# EAGLE board no holes - lpc1114-valdez-mut-v.04 (EAGLE 7.2.0)
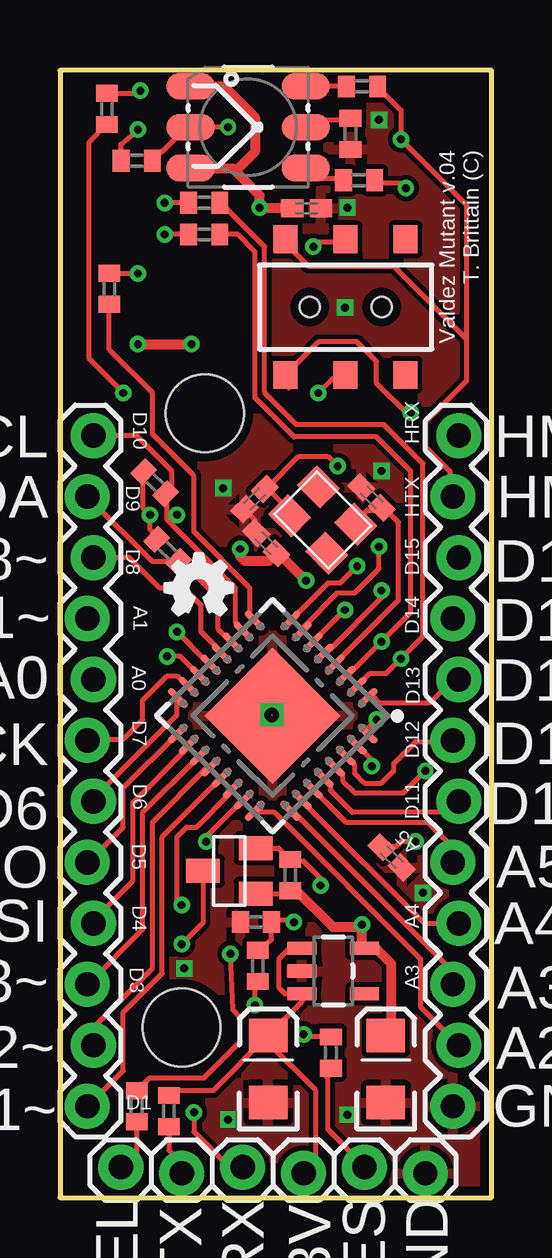
[diagram p0: board, top side]
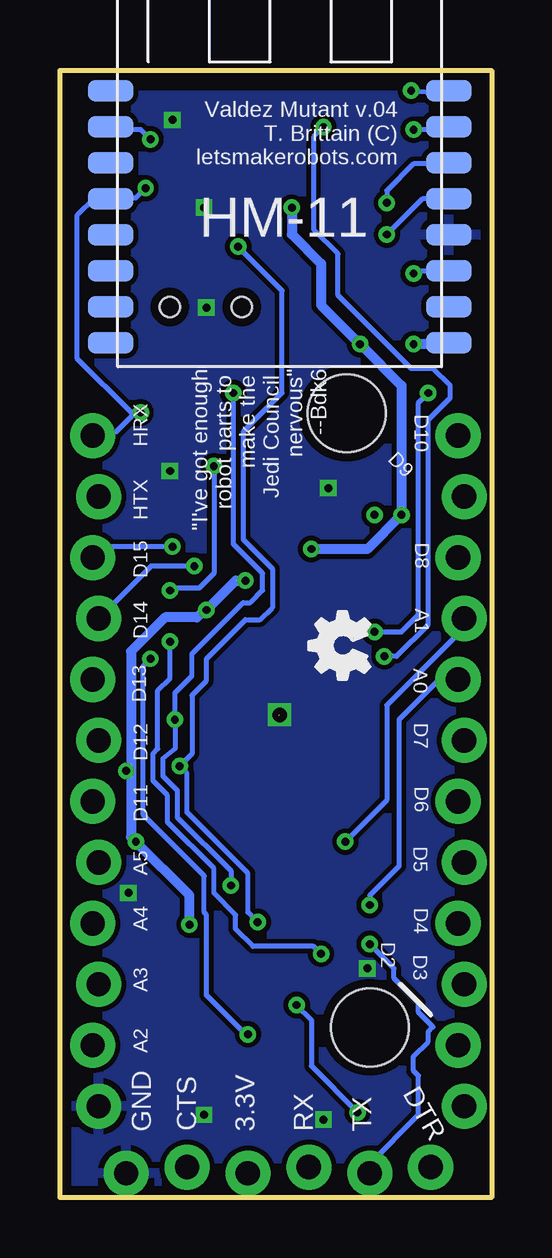
[diagram p1: board, bottom side, seen from below]

Size 18 x 46.97 mm. Coordinates in mm from the lower left corner, seen from the top.
Outline: 0,0 18,0 18,46.97 0,46.97 0,0
Copper layers (1*16): Top 0.0356mm / dielectric 1.5011mm / Bottom 0.0356mm
Design rules "LaenPCBOrder *": minimum track width 6mil, minimum drill 13mil, track to track 6mil, track to pad 6mil, pad to pad 6mil, via to via 6mil, smd to smd 6mil, copper to edge 15mil, drill to drill 6mil, minimum pad ring 7mil, minimum via ring 7mil, stop-mask expansion 3mil, vias tented up to drill 14mil, thermal gap 10mil
Net classes: 0 default: width 0.203 mm, drill 0.203 mm, clearance 0.203 mm; 1 VCC: width 0.406 mm, drill 0.406 mm, clearance 0.406 mm; 2 GND: width 0.406 mm, drill 0.406 mm, clearance 0.406 mm; 3 3.3V: width 0.406 mm, drill 0.406 mm, clearance 0.406 mm
Holes 3.25 mm at 5.07,7.1 6.04,32.68

## Footprints (pad centres in the part's own frame; a part is rotated, then mirrored left to right if it is on the bottom)
CRYSTAL_SMD_3.2X2.5 = smd 1.4 x 1.2: 1 0.6,0.5; 2 2.8,0.5; 3 2.8,2.2; 4 0.6,2.2
SOT23-5 = smd 0.55 x 1.2: 1 -0.95,-1.3; 2 0,-1.3; 3 0.95,-1.3; 4 0.95,1.3; 5 -0.95,1.3
EIA3216 = smd 1.4 x 1.6: A 1.4,0; C -1.4,0
C0402K = smd 0.925 x 0.74: 1 -0.6,0; 2 0.6,0
1X12_LOCK = drill 1.016 pad 1.88: 1 0,0.127; 2 2.54,-0.127; 3 5.08,0.127; 4 7.62,-0.127; 5 10.16,0.127; 6 12.7,-0.127; 7 15.24,0.127; 8 17.78,-0.127; 9 20.32,0.127; 10 22.86,-0.127; 11 25.4,0.127; 12 27.94,-0.127
1X06_LOCK = drill 1.016 pad 1.88: 1 0,0; 2 2.54,-0.254; 3 5.08,0; 4 7.62,-0.254; 5 10.16,0; 6 12.7,-0.254
AYZ0202 = smd 1 x 1.15: 1 -2.5,2.825; 2 0,2.825; 3 2.5,2.825; 4 -2.5,-2.825; 5 0,-2.825; 6 2.5,-2.825 | hole 0.85: 1.5,0; -1.5,0
LED-TRICOLOR-5050 = smd 2 x 1.1: 1 -2.4,1.7; 2 -2.4,0; 3 -2.4,-1.7; 4 2.4,-1.7; 5 2.4,0; 6 2.4,1.7
SOT23 = smd 1 x 1.4: 1 -0.95,-1.1; 2 0.95,-1.1; 3 0,1.1
R0402 = smd 0.7 x 0.9: 1 -0.65,0; 2 0.65,0
HVQFN33-7X7 = smd 1.067 x 0.3: P$1 -3.327,2.275; P$2 -3.327,1.625; P$3 -3.327,0.975; P$4 -3.327,0.325; P$5 -3.327,-0.325; P$6 -3.327,-0.975; P$7 -3.327,-1.625; P$8 -3.327,-2.275; P$17 3.327,-2.275; P$18 3.327,-1.625; P$19 3.327,-0.975; P$20 3.327,-0.325; P$21 3.327,0.325; P$22 3.327,0.975; P$23 3.327,1.625; P$24 3.327,2.275 | smd 0.3 x 1.067: P$9 -2.275,-3.327; P$10 -1.625,-3.327; P$11 -0.975,-3.327; P$12 -0.325,-3.327; P$13 0.325,-3.327; P$14 0.975,-3.327; P$15 1.625,-3.327; P$16 2.275,-3.327; P$25 2.275,3.327; P$26 1.625,3.327; P$27 0.975,3.327; P$28 0.325,3.327; P$29 -0.325,3.327; P$30 -0.975,3.327; P$31 -1.625,3.327; P$32 -2.275,3.327 | smd 4 x 4: P$33 0,0
HM-11 = smd 1.9 x 0.9: 1 -0.3,11.5; 2 -0.3,10; 3 -0.3,8.5; 4 -0.3,7; 5 -0.3,5.5; 6 -0.3,4; 7 -0.3,2.5; 8 -0.3,1; 9 13.8,1; 10 13.8,2.5; 11 13.8,4; 12 13.8,5.5; 13 13.8,7; 14 13.8,8.5; 15 13.8,10; 16 13.8,11.5

## Placement (x,y rotation side)
12.5MHZ  CRYSTAL_SMD_3.2X2.5  [CRYSTAL_SMD_3.2X2.5]  8.8,28.48 315 top
AP2112K-3.3TRG1  V_REG_LDOSMD  [SOT23-5]  11.4,9.44 270 top
C1  10uF  [EIA3216]  8.69,5.36 90 top
C2  22pF  [C0402K]  8.12,29.1 45 top
C3  22pF  [C0402K]  13,29.17 315 top
C4  10uF  [EIA3216]  13.59,5.36 90 top
C5  1uF  [C0402K]  13.84,14.18 315 top
C6  1uF  [C0402K]  8.61,27.27 135 top
C7  1uF  [C0402K]  10.29,41.22 0 top
JP1  M12LOCK  [1X12_LOCK]  1.27,3.81 90 top
JP2  M12LOCK  [1X12_LOCK]  16.51,3.81 90 top
JP3  [1X06_LOCK]  2.54,1.27 0 top
JS202011SCQN  DPDT  [AYZ0202]  11.91,37.11 0 top
LED1  LED-TRICOLOR-5050NO_IC  [LED-TRICOLOR-5050]  7.85,44.6 0 top
Q2  BSS138  [SOT23]  7.06,13.61 90 top
R1  330  [R0402]  11.3,6.05 90 top
R2  1k  [R0402]  2.06,37.87 270 top
R3  10k  [R0402]  4.55,3.61 90 top
R4  10k  [R0402]  9.6,13.44 270 top
R5  20k  [R0402]  8.18,11.48 180 top
R6  10k  [R0402]  8.26,9.65 90 top
R7  470  [R0402]  12.12,44.32 90 top
R8  470  [R0402]  12.6,46.3 180 top
R9  470  [R0402]  12.47,42.39 180 top
R10  4.7K  [R0402]  3.95,29.79 315 top
R11  4.7K  [R0402]  4.49,26.97 315 top
R12  330  [R0402]  6.02,41.45 180 top
R13  330  [R0402]  6.02,40.13 180 top
R14  330  [R0402]  3.2,43.21 180 top
R15  330  [R0402]  1.96,45.36 90 top
R16  330  [R0402]  3.2,3.81 90 top
U1  [HVQFN33-7X7]  8.87,20.08 225 top
U$1  HM-11  [HM-11]  15.59,34.62 0 bottom
U$2  [OSHW_FILLX100_NOTEXT]  4.38,24.28 0 top
U$3  [OSHW_FILLX100_NOTEXT]  5.08,21.59 90 bottom

## Library data of the parts
12.5MHZ = LPC1114
AP2112K-3.3TRG1 = SparkFun-PowerIC
C1 C4 = SparkFun-Capacitors
C2 C3 C5-C7 R1-R16 = resistor
JP1-JP3 = SparkFun-Connectors
JS202011SCQN = SparkFun-Electromechanical; PROD_ID: SWCH-08179
LED1 = SparkFun-LED
Q2 = SparkFun-DiscreteSemi; PROD_ID: TRANS-00830
U1 = microbuilder; DIGIKEY#: 568-4948-ND; MANF: NXP; MANF#: LPC1114FHN33/301,5
U$1 = HM-11
U$2 U$3 = ohw-logo

## Nets
3.3V: AP2112K-3.3TRG1.5 C4.A C5.1 C6.1 C7.1 LED1.1 LED1.3 Q2.1 R4.2 R10.1 R11.1 U1.P$6 U1.P$29 U$1.9
5V: AP2112K-3.3TRG1.1 AP2112K-3.3TRG1.3 C1.A JP3.4 R3.2
BUTTON?: R15.2 U$1.16
CONN: R14.2 U$1.15
GND: AP2112K-3.3TRG1.2 C1.C C2.1 C3.1 C4.C C5.2 C6.2 C7.2 JP2.1 JP3.6 R5.2 R7.1 U1.P$33 U$1.12
HM-RX: JP2.12 JS202011SCQN.4 R9.1 U$1.4
HM-TX: JP2.11 JS202011SCQN.1 R8.1 U$1.2
HM_BUTTON?: R15.1 U1.P$13
HM_CONN: LED1.2 R14.1 U1.P$14
IO20: JP2.8 U1.P$1
IO_00_RES: R1.2 R12.1 U1.P$2
IO_02: JP2.9 U1.P$8
IO_03: R2.2 U1.P$9
IO_05-SDA: JP1.11 R11.2 U1.P$11
IO_06: JP1.7 U1.P$15
IO_07: JP1.6 U1.P$16
IO_08: JP1.5 U1.P$17
IO_08-SCL: JP1.12 R10.2 U1.P$10
IO_09: JP1.4 U1.P$18
IO_10: JP1.8 U1.P$22
IO_010: JP1.3 U1.P$19
IO_11: JP1.9 U1.P$23
IO_011: JP1.1 U1.P$21
IO_12: JP2.2 U1.P$24
IO_13: JP2.3 U1.P$25
IO_14: JP2.4 U1.P$26
IO_15: JP2.7 U1.P$30
IO_18: JP2.10 U1.P$7
IO_19: JP1.10 U1.P$12
IO_32: JP2.6 U1.P$28
IO_110: JP1.2 U1.P$20
IO_111: JP2.5 U1.P$27
LPC_RES: R12.2 U$1.14
LPC_SEL: R13.1 R16.2 U1.P$3
LPC_SEL_BOOT: R13.2 U$1.13
N$2: LED1.4 R9.2
N$3: LED1.6 R8.2
N$4: LED1.5 R7.2
N$9: R2.1 U$1.11
N$31: 12.5MHZ.3 C3.2 U1.P$4
N$32: 12.5MHZ.1 C2.2 U1.P$5
RESET: JP3.5 R1.1
RX: JS202011SCQN.2 R5.1 R6.2 U1.P$31
RX-5V: JP3.3 R6.1
SEL: JP3.1 R16.1
TX: JS202011SCQN.5 Q2.2 R4.1 U1.P$32
TX-5V: JP3.2 Q2.3 R3.1

## Tracks (layer width: path | path; a pad name or v marks a point on that pad's centre or on a via)
3.3V  (via drill 0.33)
  Top 0.203: 12.8,10.36 AP2112K-3.3TRG1.5 | 13.61,6.91 C4.A | v14.83,14.83 14.22,14.83 14.02,14.63 13.61,14.63 C5.1 | U1.P$29 11.58,17.88 11.79,17.68 11.79,17.37 12.29,16.87 14.33,16.87 v15.24,17.78 | 10.36,22.96 U1.P$6 10.53,23.13 v11.89,24.49 | 5.49,42.88 LED1.3 | 3.45,30.28 R10.1 3.45,30.07 3.45,28.75 v3.76,28.45 3.76,27.84 4.03,27.57 R11.1 | 9.87,12.79 R4.2 9.48,12.66 Q2.1
  Top 0.406: 9.87,12.79 11.38,11.28 12.5,11.28 v12.6,11.38 12.6,10.49 AP2112K-3.3TRG1.5 13.18,10.39 13.82,9.75 13.82,7.11 13.61,6.91 | C7.1 9.66,41.25 v8.33,41.25 8.33,41.76 7.32,42.77 | 7.32,42.77 7.21,42.88 5.48,42.88 LED1.3 | LED1.1 6.83,46.3 8.13,45.01 8.13,43.59 7.32,42.77 | v7.52,27.03 7.52,26.72 7.72,26.52 8.7,26.52 C6.1 9.12,26.85 v10.26,25.7 | v3.25,35.56 v5.49,35.56
  Bottom 0.203: 3.86,28.35 v3.76,28.45
  Bottom 0.406: v8.33,41.25 8.33,40.13 7.11,38.91 7.11,37.19 v5.49,35.56 | v5.49,35.56 5.44,35.51 | 5.44,35.51 3.76,33.83 v3.76,28.45 5.18,27.03 v7.52,27.03 | U$1.9 1.85,35.56 v3.25,35.56 | v5.49,35.56 5.44,35.56 5.44,35.51 | v12.6,11.38 12.6,12.6 v14.83,14.83 15.04,15.04 15.04,17.98 | 15.04,17.98 15.04,22.76 13.61,24.18 12.29,24.18 v11.89,24.49 10.67,25.7 v10.26,25.7 | 15.04,17.98 v15.24,17.78
5V
  Top 0.203: AP2112K-3.3TRG1.1 9.96,10.36 9.55,10.36 9.14,9.96 9.14,8.74 9.39,8.49 AP2112K-3.3TRG1.3 10.1,8.17 C1.A | 8.74,6.71 C1.A | JP3.4 10.67,1.52 10.67,4.47 8.69,6.45 C1.A | 8.38,6.76 C1.A | C1.A 6.39,4.46 4.75,4.46 R3.2
BUTTON?  (via drill 0.33)
  Top 0.203: R15.2 3.14,46.01 v3.35,46.13
  Bottom 0.203: 2.03,46.33 1.83,46.13 U$1.16 1.88,46.02 v3.35,46.13
CONN  (via drill 0.33)
  Top 0.203: R14.2 2.55,43.9 v3.25,44.5
  Bottom 0.203: v3.25,44.5 1.83,44.5 U$1.15
GND  (via drill 0.33, 0.6)  (1 unrouted)
  Top 0.203: 8.94,20.12 9.03,20.21 | 12.19,43.69 12.19,43.67 | C6.2 8.13,27.84 8.13,28.25 7.72,28.65 C2.1
  other vias: 7.01,3.25 5.18,9.55 8.84,20.12 15.14,12.7 6.81,29.57 13.41,30.28 13.31,44.91 11.99,41.25 11.89,37.08 11.99,3.45
  pour Bottom: 0.1,45.92 0,0 17.78,0 17.88,45.92
  pour Top: 0.1,46.02 0,0 17.78,0 17.98,46.02
HM-RX  (via drill 0.33)
  Top 0.203: v14.43,42.06 14.22,42.27 13.21,42.27 R9.1 | 9.55,33.73 9.55,34.14 JS202011SCQN.4 10.79,35.66 12.39,35.66 13.21,34.85 13.21,33.93 14.43,32.72 v14.63,32.72
  Bottom 0.203: v14.43,42.06 14.83,41.66 15.85,41.66 U$1.4 15.92,41.66 16.56,41.66 17.27,40.95 17.27,34.95 15.04,32.72 v14.63,32.72 14.83,32.72 15.65,31.9 16.46,31.9 JP2.12
HM-TX  (via drill 0.33)
  Top 0.203: R8.1 13.41,46.13 14.22,45.31 v14.22,44.09 16.97,41.35 16.97,35.76 | JS202011SCQN.1 9.35,39.83 10.36,38.81 13.92,38.81 16.97,35.76 | JP2.11 16.26,29.26 16.26,30.28 15.24,31.29 15.24,32.31 16.97,34.04 16.97,35.76
  Bottom 0.203: v14.22,44.09 14.63,44.5 15.85,44.5 U$1.2
HM_BUTTON?  (via drill 0.33)
  Top 0.203: v4.88,23.57 6.1,22.35 U1.P$13 | R15.1 1.22,43.98 1.22,34.95 v2.64,33.53
  Bottom 0.203: v4.88,23.57 3.76,23.57 3.05,24.28 3.05,33.12 v2.64,33.53
HM_CONN  (via drill 0.33)
  Top 0.203: R14.1 4.23,43.59 4.27,43.59 5.28,44.6 5.28,44.7 LED1.2 v7.01,44.6 | U1.P$14 5.02,22.55 v4.47,22.55
  Bottom 0.203: v7.01,44.6 7.42,44.2 7.42,40.34 6.4,39.32 6.4,37.59 3.35,34.54 2.44,34.54 1.73,33.83 1.73,33.33 2.64,32.41 2.64,23.88 3.96,22.55 v4.47,22.55
IO20
  Top 0.203: U1.P$1 13.01,20.93 13.31,20.62 15.44,20.62 16.41,21.59 JP2.8
IO_00_RES  (via drill 0.33)
  Top 0.203: 12.39,21.34 U1.P$2 12.93,21.84 13.61,21.84 v14.22,22.45 15.14,23.37 15.14,30.58 13.51,32.21 9.86,32.21 8.53,33.53 8.53,39.62 6.71,41.45 R12.1 | R1.2 10.27,6.7 v10.16,6.81
  Bottom 0.203: v10.16,6.81 10.26,6.81 11.89,8.43 11.89,11.79 11.99,11.89 11.99,13.41 14.53,15.95 14.53,22.15 v14.22,22.45
IO_02  (via drill 0.33)
  Top 0.203: v12.39,26.31 11.68,25.6 11.18,25.6 9.75,24.18 U1.P$8
  Bottom 0.203: v12.39,26.31 14.2,26.31 JP2.9
IO_03
  Top 0.203: U1.P$9 7.92,24.18 7.92,25.4 5.59,27.74 5.59,30.07 3.86,31.8 3.86,33.53 2.06,35.33 R2.2 | 2.06,37.16 R2.2 | 2.03,37.2 R2.2
IO_05-SDA
  Top 0.203: U1.P$11 7.11,23.16 6.6,23.67 6.6,24.99 5.09,26.51 R11.2 3.85,26.51 JP1.11
IO_06
  Top 0.203: U1.P$15 5.28,21.34 4.88,21.74 4.47,21.74 3.45,20.73 3.45,19.91 2.64,19.1 1.22,19.1 JP1.7
IO_07
  Top 0.203: U1.P$16 4.88,20.73 4.88,20.12 1.42,16.66 JP1.6
IO_08
  Top 0.203: U1.P$17 4.88,19.3 2.64,17.07 2.64,15.44 1.22,14.02 JP1.5
IO_08-SCL  (via drill 0.33)
  Top 0.203: 4.47,28.45 4.47,28.25 7.32,25.4 7.32,23.98 7.52,23.77 U1.P$10 | 4.47,28.45 4.47,29.26 R10.2 4.67,29.6 4.67,30.28 3.2,31.75 JP1.12 | 4.47,28.45 v4.88,28.45
IO_09
  Top 0.203: U1.P$18 5.28,18.69 3.05,16.46 3.05,13.21 1.42,11.58 JP1.4
IO_10  (via drill 0.33)
  Top 0.203: v5.08,12.19 4.88,12.39 4.88,15.04 5.28,15.44 5.69,15.44 7.11,16.87 U1.P$22
  Bottom 0.203: v5.08,12.19 5.08,12.6 3.86,13.82 3.86,19.91 2.23,21.54 1.42,21.54 JP1.8
IO_010
  Top 0.203: U1.P$19 5.69,18.29 3.45,16.05 3.45,11.18 1.22,8.94 JP1.3
IO_11  (via drill 0.33)
  Top 0.203: U1.P$23 7.52,16.46 6.1,15.04 v6.1,14.83
  Bottom 0.203: JP1.9 1.14,23.75 4.37,20.52 4.37,16.56 v6.1,14.83
IO_011
  Top 0.203: U1.P$21 6.71,17.48 4.27,15.04 4.27,9.35 2.64,7.72 2.64,5.28 1.22,3.86 JP1.1
IO_12
  Top 0.203: U1.P$24 8.13,16.05 8.94,16.05 15.04,9.96 15.04,7.95 JP2.2
IO_13
  Top 0.203: U1.P$25 9.75,16.05 16.38,9.42 JP2.3
IO_14
  Top 0.203: U1.P$26 10.16,16.46 15.19,11.43 JP2.4
IO_15
  Top 0.203: 11.99,18.29 U1.P$30 12.29,18.04 12.29,17.68 12.7,17.27 13.41,17.27 13.92,17.78 13.92,18.09 14.83,19 16.33,19 JP2.7
IO_18  (via drill 0.33)
  Top 0.203: U1.P$7 10.16,23.77 11.58,25.2 12.29,25.2 13.31,26.21 v13.31,27.13
  Bottom 0.203: v13.31,27.13 16.18,27.13 JP2.10
IO_19
  Top 0.203: U1.P$12 6.71,22.76 5.89,23.57 5.89,24.69 5.18,25.4 4.17,25.4 2.9,26.67 JP1.10
IO_32
  Top 0.203: JP2.6 16.18,16.05 12.19,16.05 11.28,16.97 11.28,17.21 U1.P$28
IO_110
  Top 0.203: U1.P$20 6.1,17.88 3.86,15.65 3.86,9.55 1.42,7.11 1.42,6.5 JP1.2
IO_111
  Top 0.203: U1.P$27 11.93,15.65 15.34,15.65 16.38,14.61 JP2.5
LPC_RES  (via drill 0.33)
  Top 0.203: R12.2 v4.37,41.45
  Bottom 0.203: U$1.14 1.83,43.08 3.25,43.08 4.37,41.96 v4.37,41.45
LPC_SEL  (via drill 0.33)
  Top 0.203: U1.P$3 11.99,21.75 v13.41,23.16 14.63,24.38 14.63,30.28 13.21,31.7 9.75,31.7 8.13,33.33 8.13,39.42 7.42,40.13 R13.1 | v7.11,10.16 7.21,7.82 7.52,7.52 7.52,6.5 5.99,4.98 3.72,4.98 R16.2
  Bottom 0.203: v7.11,10.16 7.42,10.46 9.96,10.46 10.67,11.18 10.67,11.79 11.58,12.7 11.58,13.72 13.51,15.65 13.51,16.76 14.12,17.37 14.12,18.49 13.92,18.69 13.92,21.13 13.41,21.64 v13.41,23.16
LPC_SEL_BOOT  (via drill 0.33)
  Top 0.203: R13.2 v4.37,40.13
  Bottom 0.203: U$1.13 2.88,41.62 v4.37,40.13
N$2
  Top 0.203: R9.2 11.79,42.47 10.77,42.47 10.36,42.88 LED1.4
N$3
  Top 0.203: R8.2 11.79,46.33 10.36,46.33 LED1.6
N$4
  Top 0.203: R7.2 11.99,44.91 10.57,44.91 10.36,44.7 LED1.5
N$9  (via drill 0.33)
  Top 0.203: R2.1 3.24,38.52 v3.25,38.51
  Bottom 0.203: U$1.11 1.83,38.61 3.15,38.61 v3.25,38.51
N$31
  Top 0.203: 12.5MHZ.3 12.39,28.25 12.8,28.65 13.41,28.65 C3.2 13.52,28.75 14.12,28.14 14.12,24.89 11.58,22.35 U1.P$4
N$32  (via drill 0.33)
  Top 0.203: 12.5MHZ.1 9.75,28.45 8.74,29.46 C2.2 8.74,29.67 9.96,30.89 11.18,30.89 v11.58,30.48 | U1.P$5 11.18,22.76 11.18,22.86 11.28,22.86 13.41,24.99 v13.41,25.3
  Bottom 0.203: v11.58,30.48 11.58,26.01 12.19,25.4 13.31,25.4 v13.41,25.3
RESET
  Top 0.203: JP3.5 12.6,1.42 11.18,2.85 11.18,4.98 11.1,5.05 R1.1
RX  (via drill 0.33)
  Top 0.203: v10.57,39.62 10.77,39.83 11.79,39.83 JS202011SCQN.2 | 8.33,10.16 R6.2 8.83,10.77 R5.1 8.93,11.58 9.55,11.58 v9.75,11.48 | U1.P$31 13.01,18.25 v13.01,17.98
  Bottom 0.203: v10.57,39.62 8.74,37.8 8.74,33.53 10.36,31.9 10.36,27.43 9.14,26.21 9.14,24.59 9.65,24.08 10.26,24.08 11.89,22.45 11.89,21.54 12.5,20.93 12.5,18.49 v13.01,17.98 12.7,17.68 12.7,16.05 10.16,13.51 10.16,11.89 v9.75,11.48
RX-5V  (via drill 0.33)
  Top 0.203: v8.13,8.03 8.13,8.74 R6.1 | v5.59,3.56 5.59,2.74 7.01,1.32 7.57,1.32 JP3.3
  Bottom 0.203: v8.13,8.03 7.52,7.42 7.52,5.49 v5.59,3.56
SEL
  Top 0.203: R16.1 3.2,1.93 JP3.1
TX  (via drill 0.33, 0.33 pad 0.25)
  Top 0.203: v10.77,33.53 11.38,34.14 11.79,34.14 JS202011SCQN.5 | Q2.2 9.12,14.56 R4.1 9.67,14.02 10.16,14.02 10.87,13.31 v10.87,13.01 | U1.P$32 12.83,19.54 v13.21,19.91
  Bottom 0.203: v10.87,13.01 10.87,13.61 13.11,15.85 13.11,16.97 13.72,17.58 13.72,18.29 13.21,18.69 v13.21,19.91 13.21,21.03 12.5,21.74 12.5,22.66 10.36,24.79 10.06,24.79 9.55,25.3 9.55,26.01 10.77,27.23 v10.77,33.53
TX-5V  (via drill 0.33)
  Top 0.203: Q2.3 5.96,11.45 v5.08,10.57 | R3.1 4.55,1.96 5.08,1.42 JP3.2
  Bottom 0.203: v5.08,10.57 4.06,9.55 4.06,9.14 3.05,8.13 3.05,7.72 2.44,7.11 2.64,6.91 2.64,6.5 3.25,5.89 3.25,5.28 3.05,5.08 3.05,3.45 5.08,1.42 JP3.2

## Text on the board
tNames: Valdez Mutant v.04 / T. Brittain (C) | D10 SCL | D10 | HRX | HM-RX | D9 SDA | D9 | HTX | HM-TX | D8~ | D8 | D15 | D15 | A1~ | A1 | D14 | D14~ | A0 | A0 | D13 | D13 | D7 SCK | D7 | D12 | D12~ | D6 | D6 | D11 | D11 | D5~MISO | D5 | A5 | A5 | D4~MOSI | D4 | A4 | A4~WAKE | D3~ | D3 | A3 | A3~ | D2~ | A2~ | D1~ | D1 | GND | TX | RX | 3.3V | GND | DTR/SEL | CTS/RES
bNames: Valdez Mutant v.04 / T. Brittain (C) / letsmakerobots.com | "I've got enough / robot parts to / make the / Jedi Council / nervous" / --Bdk6 | D10 | HRX | D9 | HTX | D8 | D15 | A1 | D14 | A0 | D13 | D7 | D12 | D6 | D11 | D5 | A5 | D4 | A4 | D2 | D3 | A3 | A2 | DTR | TX | RX | 3.3V | CTS | GND